# Altium PCB Copy of BSc_PCB_teikningcopy1.PcbDoc
Units mil, origin at the board's own origin, x right, y up, seen from the top; angles counter-clockwise.
Board outline 3150.59 x 3350.1 mil, 2 copper layers (Top Layer, Bottom Layer); 45 components, 39 nets, 192 pads, 19 vias.
Unrouted connection lines stored in the file: 58.
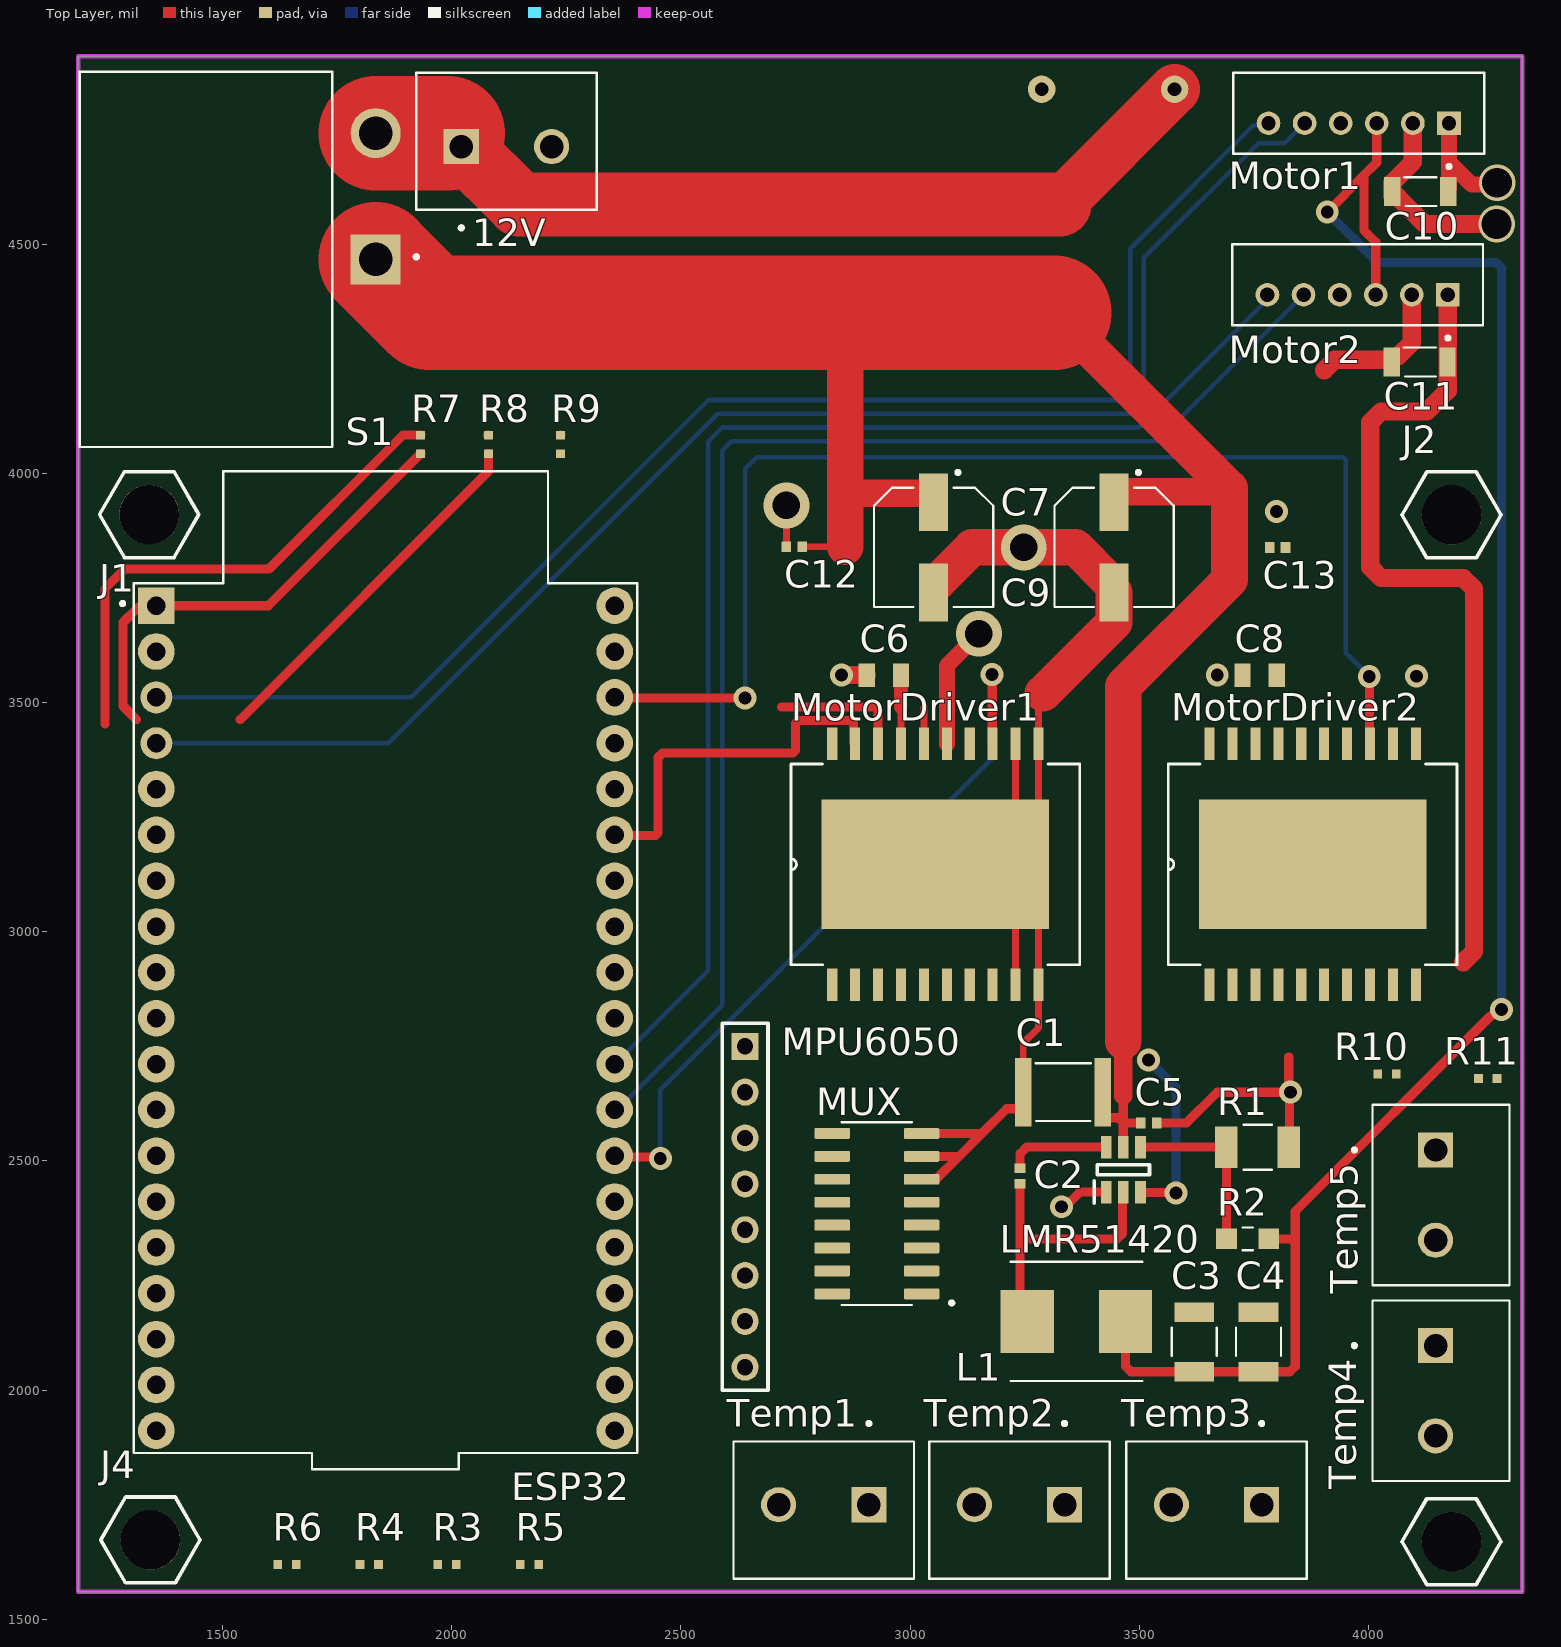
[diagram p0: Top Layer view]
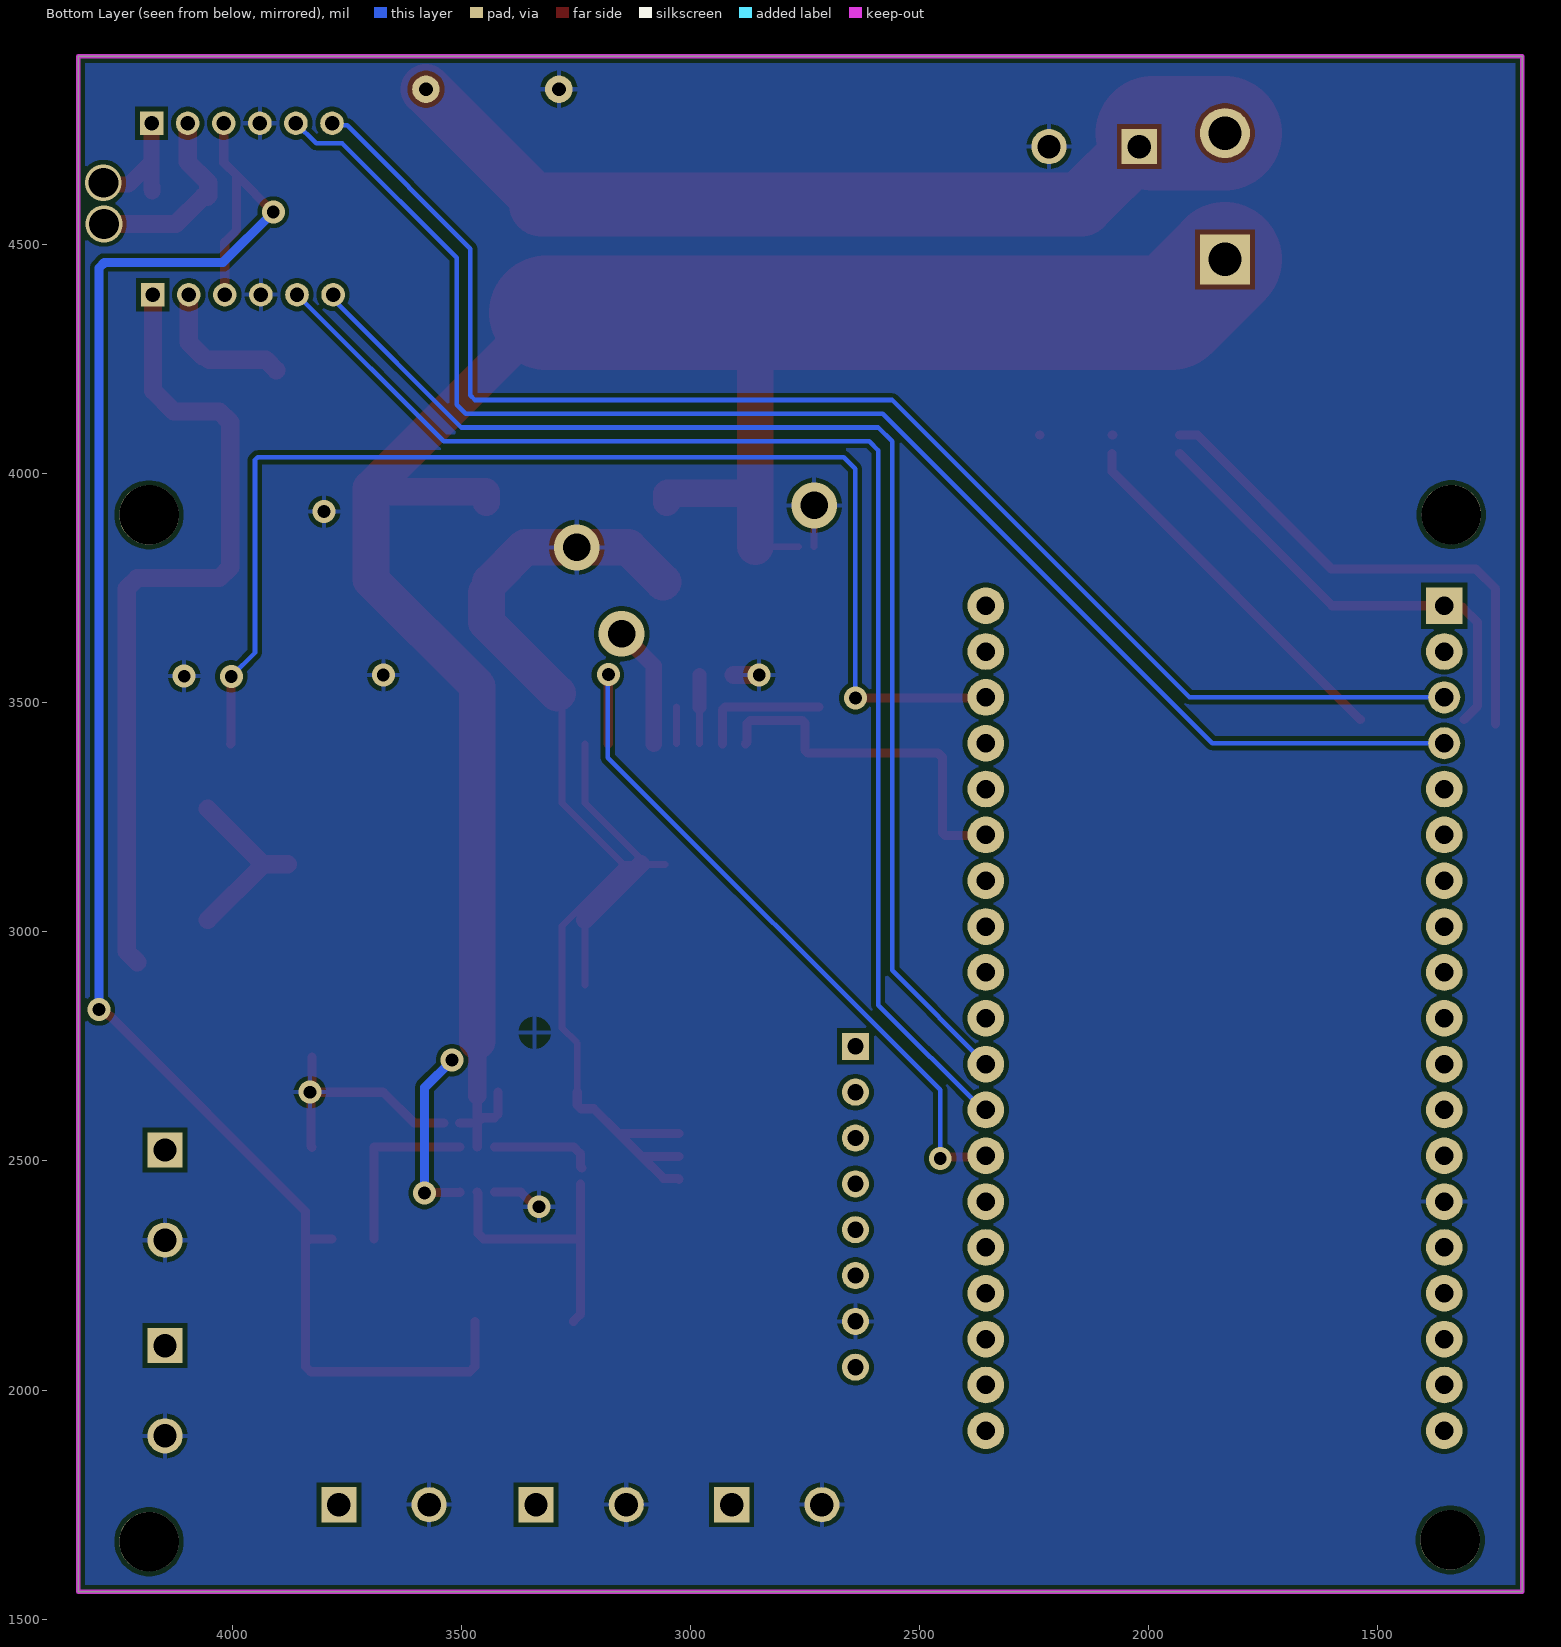
[diagram p1: Bottom Layer view, seen from below]

## Layer stack, top to bottom
Top Solder: solder mask 0.4, Solder Resist, Dk 3.5
Top Layer: signal copper 1.4
Dielectric 1: dielectric 12.6, FR-4, Dk 4.8
Bottom Layer: signal copper 1.4
Bottom Solder: solder mask 0.4, Solder Resist, Dk 3.5

## Board outline
1185.04,1560 1185.04,4910 3570,4910 3569.16,4910.1 4335.63,4910.1 4335.63,1560.04 4335.59,1560

## Design rules (kind name [scope] priority, off if disabled: settings)
Clearance [All] p1: gap=10 ignorepadtopadclearanceinfootprint=FALSE except(0: Arc-Hole Track-Hole SMDPad-Hole THPad-Hole Via-Hole Fill-Hole Poly-Hole Region-Hole Text-Hole)
PolygonConnect [All] p1: connectstyle=Relief reliefconductorwidth=10 reliefentries=4 polygonreliefangle="90 Angle" airgapwidth=10
RoutingVias [All] p1: holewidth=28 width=50 viastyle="Through Hole" minholewidth=28 minwidth=50 maxholewidth=80 maxwidth=100
SolderMaskExpansion [All] p1: expansion=4 istentingtop=FALSE
Width [All] p1: maxlimit=500 minlimit=10 preferedwidth=10 minimp=50.000000 maximp=50.000000 favimp=50.000000
30 further rules are at their usual default settings.

## Classes and differential pairs
component class BSc_skjemateikning: 12V C1 C2 C3 C4 C5 C6 C7 C8 C9 C10 C11 C12 C13 ESP32 J1 J2 J4 L1 LMR51420 Motor1 Motor2 MotorDriver1 MotorDriver2 MPU6050 R1 R2 R3 R4 R5 R6 R7 R8 R9 R10 R11 S1 Temp1 Temp2 Temp3 Temp4 Temp5

## Components (designator, comment, footprint, x,y, rotation, side; value= is the part's Value field where it differs from the comment)
12V "TB002-500-02BE" CUI_TB002-500-02BE 2020.87,4712.83 r0 top
C1 "885012210032" WCAP-CSGP_885012210032 3333.39,2650 r0 top
C2 "CGA2B3X7R1E104K050BB" CAPC1005X55N 3240,2467.2 r270 top
C3 "CGA6P3X7R1E226M250AE" CAP_CGA6P3X7R1E226M250AE 3620,2105.04 r270 top
C4 "CGA6P3X7R1E226M250AE" CAP_CGA6P3X7R1E226M250AE 3760,2105.04 r270 top
C5 "CGA2B3X7R1E104K050BB" CAPC1005X55N 3520.52,2582.93 r0 top
C6 "885012207125" WCAP-CSGP_885012207125 2942.6,3560 r0 top
C7 "EEETQV470XAP" CAP_EEETQV470XAP 3051.18,3838.58 r270 top
C8 "885012207125" WCAP-CSGP_885012207125 3762.6,3560 r0 top
C9 "EEETQV470XAP" CAP_EEETQV470XAP 3444.88,3838.58 r270 top
C10 "885012208069" WCAP-CSGP_885012208069 4113.02,4614.65 r0 top
C11 "885012208069" WCAP-CSGP_885012208069 4111.59,4242.88 r0 top
C12 "CGA2B3X7R1E104K050BB" CAPC1005X55N 2747.2,3840 r180 top
C13 "CGA2B3X7R1E104K050BB" CAPC1005X55N 3801.69,3838.58 r0 top
ESP32 "ESP32-DEVKITC" MODULE_ESP32-DEVKITC 1855.51,2811.65 r0 top
J1 "15TSP105" SAMTEC_SO-0715-02-01-01-L 1340,3910 r0 top
J2 "15TSP105" SAMTEC_SO-0715-02-01-01-L 4181.1,3909.45 r0 top
J3 "15TSP105" SAMTEC_SO-0715-02-01-01-L 4181.1,1669.29 r180 top
J4 "15TSP105" SAMTEC_SO-0715-02-01-01-L 1342.52,1673.23 r0 top
L1 "AMPLA7050S-100MT" IND_AMPLA7050S-100MT 3362.72,2150 r0 top
LMR51420 "LMR51420XDDCR" SOT95P280X110-6N 3465.07,2481.08 r90 top
Motor1 "" JST_B6B-PH-K-S(LF)(SN) 3978.71,4785.56 r0 top
Motor2 "" JST_B6B-PH-K-S(LF)(SN) 3976.38,4411.42 r0 top
MotorDriver1 "MC33886PVW" SOIC127P1420X340-21N 3055,3147 r90 top
MotorDriver2 "MC33886PVW" SOIC127P1420X340-21N 3878.25,3147 r90 top
MPU6050 "" HDR1X8 2640,2750 r270 top
MUX "SN74LV4051ADR" SOIC127P600X175-16N 2927.44,2385 r180 top (schematic designator Multiplexer)
R1 "ERJ14NF1372U" RES_ERJ14NF1372U 3757.91,2530 r180 top
R2 "ERJP06D1003V" RES_ERJP06D1003V 3736.26,2330 r180 top
R3 "ERJ2RKF1002X" RES_ERJ2RKF1002X 1989.84,1620 r0 top
R4 "ERJ2RKF1002X" RES_ERJ2RKF1002X 1820,1620 r180 top
R5 "ERJ2RKF1002X" RES_ERJ2RKF1002X 2170,1620 r0 top
R6 "ERJ2RKF1002X" RES_ERJ2RKF1002X 1640.16,1620 r0 top
R7 "ERJ2RKF1002X" RES_ERJ2RKF1002X 1932.28,4063.23 r270 top
R8 "ERJ2RKF1002X" RES_ERJ2RKF1002X 2079.92,4063.23 r90 top
R9 "ERJ2RKF1002X" RES_ERJ2RKF1002X 2237.4,4063.23 r90 top
R10 "ERJ2RKF1002X" RES_ERJ2RKF1002X 4040,2690 r180 top
R11 "ERJ2RKF1002X" RES_ERJ2RKF1002X 4260.16,2680 r0 top
S1 "R1966ABLKBLKGR" SW_R1966ABLKBLKGR 1833.86,4466.77 r270 top
Temp1 "TB002-500-02BE" CUI_TB002-500-02BE 2910,1750 r180 top
Temp2 "TB002-500-02BE" CUI_TB002-500-02BE 3336.85,1750 r180 top
Temp3 "TB002-500-02BE" CUI_TB002-500-02BE 3766.85,1750 r180 top
Temp4 "TB002-500-02BE" CUI_TB002-500-02BE 4146.29,2097.02 r270 top
Temp5 "TB002-500-02BE" CUI_TB002-500-02BE 4146.29,2523.84 r270 top
? "USB Li-ion batterilader" "USB Li-ion batterilader" 3576.98,4838.01 r180 top

## Footprints (in the part's own frame and the unit in brackets; to place one, negate y for a bottom-side part, rotate by r counter-clockwise, add the part's x,y. Pads: shape width x height; smd on the part's side, far side on the other; paste and mask are expansions set on the pad)
CAP_CGA6P3X7R1E226M250AE [mm]
  rect 1.1x2.2 smd: 1(-1.65,0) 2(1.65,0)
  silkscreen extent -0.78,-1.25 0.78,1.25, body extent -1.6,-1.25 1.6,1.25, height 2.8
CAP_EEETQV470XAP [mm]
  rect 3.2x1.6 smd: 1(-2.5,0) 2(2.5,0)
  silkscreen extent -4.25,-3.3 3.3,3.3, body extent -3.65,-3.3 3.65,3.3, height 7.7
CAPC1005X55N [mm]
  rect 0.53x0.6 smd: 1(-0.437,0) 2(0.437,0)
  body extent -0.5,-0.25 0.5,0.25, height 0.55
CUI_TB002-500-02BE [mm]
  rect 1.95x1.95 hole 1.3: 1(0,0)
  round 1.95 hole 1.3: 2(5,0)
  silkscreen extent -2.5,-4.6 7.5,4.1
HDR1X8 [mm] "Connector; Header; 8 Position"
  rect 1.5x1.5 hole 0.9: 1(0,0)
  round 1.5 hole 0.9: 2(2.54,0) 3(5.08,0) 4(7.62,0) 5(10.16,0) 6(12.7,0) 7(15.24,0) 8(17.78,0)
  silkscreen extent -1.27,-1.27 19.05,1.27
IND_AMPLA7050S-100MT [mm]
  rect 2.95x3.5 smd: 1(-2.725,0) 2(2.725,0)
  silkscreen extent -3.65,-3.3 3.65,3.3, body extent -3.72,-3.3 3.72,3.3, height 4.8
JST_B6B-PH-K-S(LF)(SN) [mm]
  rect 1.308x1.308 hole 0.8: 1(5,-0.55)
  round 1.308 hole 0.8: 2(3,-0.55) 3(1,-0.55) 4(-1,-0.55) 5(-3,-0.55) 6(-5,-0.55)
  silkscreen extent -6.95,-3.05 6.95,2.25
MODULE_ESP32-DEVKITC [mil]
  rect 80x80 hole 40.16: 1(-500,899.61)
  round 80 hole 40.16: 2(-500,799.61) 5(-500,499.61) 6(-500,399.61) 7(-500,299.61) 8(-500,199.61) 9(-500,99.61) 10(-500,-0.39) 11(-500,-100.39) 12(-500,-200.39) 13(-500,-300.39) 14(-500,-400.39) 15(-500,-500.39) 16(-500,-600.39) 17(-500,-700.39) 18(-500,-800.39) 19(-500,-900.39) 20(500,-900.39) 21(500,-800.39) 22(500,-700.39) 23(500,-600.39) 24(500,-500.39) 25(500,-400.39) 26(500,-300.39) 27(500,-200.39) 28(500,-100.39) 29(500,-0.39) 30(500,99.61) 31(500,199.61) 32(500,299.61) 33(500,399.61) 34(500,499.61) 35(500,599.61) 36(500,699.61) 37(500,799.61) 38(500,899.61)
  round 70 hole 40.16: 3(-500,699.61) 4(-500,599.61)
  silkscreen extent -578,-984 549,1193, body extent -550,-976 550,1193, height 228
RES_ERJ2RKF1002X [mm]
  rect 0.475x0.5 smd: 1(-0.512,0) 2(0.512,0)
  body extent -0.5,-0.25 0.5,0.25, height 0.35
RES_ERJ14NF1372U [mm]
  rect 1.25x2.3 smd: 1(-1.725,0) 2(1.725,0)
  silkscreen extent -0.78,-1.25 0.78,1.25, body extent -1.6,-1.25 1.6,1.25, height 0.6
RES_ERJP06D1003V [mm]
  rect 1.15x1.15 smd: 1(-1.175,0) 2(1.175,0)
  silkscreen extent -0.28,-0.63 0.28,0.63, body extent -1,-0.63 1,0.63, height 0.6
SAMTEC_SO-0715-02-01-01-L [mm]
  round 3.3 hole 3.3 unplated: ""(0,0)
  silkscreen extent -2.75,-2.38 2.75,2.38
SOIC127P600X175-16N [mm]
  rrect25% 1.97x0.6 smd: 1(-2.475,4.445) 2(-2.475,3.175) 3(-2.475,1.905) 4(-2.475,0.635) 5(-2.475,-0.635) 6(-2.475,-1.905) 7(-2.475,-3.175) 8(-2.475,-4.445) 9(2.475,-4.445) 10(2.475,-3.175) 11(2.475,-1.905) 12(2.475,-0.635) 13(2.475,0.635) 14(2.475,1.905) 15(2.475,3.175) 16(2.475,4.445)
  silkscreen extent -4.25,-5.06 1.95,5.06, body extent -3,-4.95 3,4.95, height 1.75
SOIC127P1420X340-21N [mil]
  rect 71x22 smd: 1(-263,225) 2(-263,175) 3(-263,125) 4(-263,75) 5(-263,25) 6(-263,-25) 7(-263,-75) 8(-263,-125) 9(-263,-175) 10(-263,-225) 11(263,-225) 12(263,-175) 13(263,-125) 14(263,-75) 15(263,-25) 16(263,25) 17(263,75) 18(263,125) 19(263,175) 20(263,225)
  rect 283x496 smd: 21(0,0)
  silkscreen extent -219,-315 219,315, body extent -280,-313 280,313, height 134
SOT95P280X110-6N [mm]
  rect 1.25x0.6 smd: 1(-1.25,0.95) 2(-1.25,0) 3(-1.25,-0.95) 4(1.25,-0.95) 5(1.25,0) 6(1.25,0.95)
  silkscreen extent -1.88,-1.45 0.28,1.6, body extent -1.4,-1.45 1.4,1.45, height 0.97
SW_R1966ABLKBLKGR [mm]
  rect 2.775x2.775 hole 1.85: 1(0,0)
  round 2.775 hole 1.85: 1A(-7,0)
  silkscreen extent -10.4,-16.4 10.4,2.35, body extent -10.47,-22.2 10.47,0.6, height 14.8
"USB Li-ion batterilader" [mil]
  round 60 hole 30: 1(0,0) 2(290,0)
  body extent -100,-40 1235,810, height 197
WCAP-CSGP_885012207125 [mm]
  rect 0.9x1.3 smd: 1(-0.95,0) 2(0.95,0)
  body extent -1,-0.63 1,0.63, height 0.63
WCAP-CSGP_885012208069 [mm]
  rect 0.9x1.6 smd: 1(-1.55,0) 2(1.55,0)
  silkscreen extent -0.9,-0.8 0.9,0.8, body extent -1.6,-0.8 1.6,0.8, height 1.25
WCAP-CSGP_885012210032 [mm]
  rect 0.9x3.8 smd: 1(-2.2,0) 2(2.2,0)
  silkscreen extent -1.52,-1.6 1.56,1.6, body extent -1.6,-1.25 1.6,1.25, height 0.38

## Part data
12V C3 C4 C7 C9 ESP32 L1 MUX R1 R2 R3 R4 R5 R6 R7 R8 R9 R10 R11 S1 Temp1 Temp2 Temp3 Temp4 Temp5: Package=None, Availability=Unavailable, Price=None
  12V Temp1 Temp2 Temp3 Temp4 Temp5: MF="{'manufacturer': u'CUI Devices'}", MP=TB002-500-02BE
  C3 C4: MF="{'manufacturer': u'TDK Corporation'}", MP=CGA6P3X7R1E226M250AE
  C7 C9: MF="{'manufacturer': u'Panasonic'}", MP=EEETQV470XAP
  ESP32: MF="{'manufacturer': u'Olimex LTD'}", MP=ESP32-DEVKITC
  L1: MF="{'manufacturer': u'Abracon Corporation'}", MP=AMPLA7050S-100MT
  MUX: MF="{'manufacturer': u'Texas Instruments'}", MP=SN74LV4051ADR
  R1: MF="{'manufacturer': u'Panasonic'}", MP=ERJ14NF1372U
  R2: MF="{'manufacturer': u'Panasonic'}", MP=ERJP06D1003V
  R3 R4 R5 R6 R7 R8 R9 R10 R11: MF="{'manufacturer': u'Panasonic'}", MP=ERJ2RKF1002X
  S1: MF="{'manufacturer': u'E-Switch'}", MP=R1966ABLKBLKGR
C1: "<b> WCAP-CSGP Ceramic Capacitors <br> <br> <br><b>Characteristics </b><br> </b><br>Multilayer Ceramic Chip Capacitor <br>Recommended soldering:Reflow, for 0603 and 0805 wave soldering is also allowed <br>Operating temperature:-55 Â°C to +125 Â°C; <br>Ceramic characteristics: Class I - NPO ; Class II -X7R, X5R <br>High performance ceramic <br>High capacitance stability <br>Minimal aging  <br>Termination:Cu/Ni/Sn <br>   <br><a href=\"http://katalog.we-online.de/media/images/eisos/WCAP-CSGP_pf2.jpg\" title=\"Enlarge picture\"> <img src=\"http://katalog.we-online.de/media/thumbs2/eisos/thb_WCAP-CSGP_pf2.jpg\" width=\"320\"></a><p> Details see: <a href=\"http://katalog.we-online.de/en/pbs/WCAP-CSGP-1812?\">http://katalog.we-online.de/en/pbs/WCAP-CSGP-1812? </a><p>Created:  2015-01-28 <br>2015 (C) Wurth Elektronik", Package=None, Availability=Unavailable, MF="{'manufacturer': u'Wurth Electronics Inc'}", MP=885012210032, Price=None
C2 C5 C12 C13: "0.1 ÂµF Â±10% 25V Ceramic Capacitor X7R 0402 (1005 Metric)", Package=None, Availability=Unavailable, MF="{'manufacturer': u'TDK Electronics'}", MP=CGA2B3X7R1E104K050BB, Price=None
C6 C8: "<b> WCAP-CSGP Ceramic Capacitors <br> <br> <br><b>Characteristics </b><br> </b><br>Multilayer Ceramic Chip Capacitor <br>Recommended soldering:Reflow, for 0603 and 0805 wave soldering is also allowed <br>Operating temperature:-55 Â°C to +125 Â°C; <br>Ceramic characteristics: Class I - NPO ; Class II -X7R, X5R <br>High performance ceramic <br>High capacitance stability <br>Minimal aging  <br>Termination:Cu/Ni/Sn <br>   <br><a href=\"http://katalog.we-online.de/media/images/eisos/WCAP-CSGP_pf2.jpg\" title=\"Enlarge picture\"> <img src=\"http://katalog.we-online.de/media/thumbs2/eisos/thb_WCAP-CSGP_pf2.jpg\" width=\"320\"></a><p> Details see: <a href=\"http://katalog.we-online.de/en/pbs/WCAP-CSGP-0805?\">http://katalog.we-online.de/en/pbs/WCAP-CSGP-0805? </a><p>Created:  2015-01-28 <br>2015 (C) Wurth Elektronik", Package=None, Availability=Unavailable, MF="{'manufacturer': u'Wurth Electronics Inc'}", MP=885012207125, Price=None
C10 C11: "<b> WCAP-CSGP Ceramic Capacitors <br> <br> <br><b>Characteristics </b><br> </b><br>Multilayer Ceramic Chip Capacitor <br>Recommended soldering:Reflow, for 0603 and 0805 wave soldering is also allowed <br>Operating temperature:-55 Â°C to +125 Â°C; <br>Ceramic characteristics: Class I - NPO ; Class II -X7R, X5R <br>High performance ceramic <br>High capacitance stability <br>Minimal aging  <br>Termination:Cu/Ni/Sn <br>   <br><a href=\"http://katalog.we-online.de/media/images/eisos/WCAP-CSGP_pf2.jpg\" title=\"Enlarge picture\"> <img src=\"http://katalog.we-online.de/media/thumbs2/eisos/thb_WCAP-CSGP_pf2.jpg\" width=\"320\"></a><p> Details see: <a href=\"http://katalog.we-online.de/en/pbs/WCAP-CSGP-1206?\">http://katalog.we-online.de/en/pbs/WCAP-CSGP-1206? </a><p>Created:  2015-01-28 <br>2015 (C) Wurth Elektronik", Package=None, Availability=Unavailable, MF="{'manufacturer': u'Wurth Electronics Inc'}", MP=885012208069, Price=None
J1 J2 J3 J4: library part SO-0715-02-01-01-L, Package=None, Availability=Unavailable, MF="{'manufacturer': u'Samtec'}", MP=SO-0715-02-01-01-L, Price=None
LMR51420: "Integrated Circuit", Manufacturer_Name="Texas Instruments", Mouser Part Number=595-LMR51420XDDCR, Arrow Part Number=LMR51420XDDCR, Arrow Price/Stock=https://www.arrow.com/en/products/lmr51420xddcr/texas-instruments?region=nac, Datasheet Link=https://www.ti.com/lit/ds/symlink/lmr51420.pdf?ts=1663231243064, Height=1.1mm, Manufacturer_Part_Number=LMR51420XDDCR, Mouser Price/Stock=https://www.mouser.co.uk/ProductDetail/Texas-Instruments/LMR51420XDDCR?qs=vvQtp7zwQdN6fBqQU4azxw%3D%3D
Motor1 Motor2: library part B6B-PH-K-S(LF)(SN), Package=None, Availability=Unavailable, MF="{'manufacturer': u'JST'}", MP=B6B-PH-K-S(LF)(SN), Price=None
MotorDriver1 MotorDriver2: "H-Bridge", Package=None, Availability=Unavailable, MF="{'manufacturer': u'NXP USA'}", MP=MC33886PVW, Price=None
MPU6050: library part "Header 8", "Header, 8-Pin", LatestRevisionDate=17-Jul-2002, LatestRevisionNote="Re-released for DXP Platform.", Publisher="Altium Limited"

## Via types
v1: diameter 50, hole 28, Top Layer to Bottom Layer, 13 vias
v2: diameter 100, hole 60, Top Layer to Bottom Layer, 3 vias
v3: diameter 80, hole 65, Top Layer to Bottom Layer, 2 vias
v4: diameter 50/50 (per signal layer), hole 28, Top Layer to Bottom Layer, 1 vias

## Nets (pads, with @x,y where several pads share a name; then routed paths per layer and width w, separated by ;. In a path a pad name is that pad's centre, name@x,y a point inside that pad or via, vN(x,y) a via of type N, cw(c..) or ccw(c..) an arc to the next point about the centre after c; other vN are vias at no path point)
D1: ESP32.37 MotorDriver2.18
D2: ESP32.36 MotorDriver2.13 | length 2749.6
  Top Layer w20: ESP32.36 2356.77,3510 v1(2640,3510) ; v1(4001.61,3557.02) 4002.43,3556.19 4002.43,3410.82 MotorDriver2.13
  Bottom Layer w10: v1(2640,3510) 2640,4010 2665.43,4035.43 3944.14,4035.43 3950,4029.58 3950,3608.63 v1(4001.61,3557.02)
D3: ESP32.15 MotorDriver1.18 | length 286.6
  Top Layer w20: 2720,3490 2924.14,3490 2930,3484.14 MotorDriver1.18
D4: ESP32.26 MotorDriver1.13 | length 1609.8
  Top Layer w20: ESP32.26 2358.45,2508.33 2452.07,2508.33 v1(2455,2505.39) ; v1(3178.55,3560.87) 3179.28,3560.14 3179.28,3410.72 MotorDriver1.13
  Bottom Layer w10: v1(2455,2505.39) 2455,2655 3180,3380 3180,3559.42 v1(3178.55,3560.87)
FS1: ESP32.5 MotorDriver2.2 R6.1
FS2: ESP32.6 MotorDriver1.2 R5.2
GND: 12V.2 ?.2 C1.1 C3.1 C4.1 C5.2 C6.1 C7.2 C8.1 C9.2 C12.2 C13.2 ESP32.14 LMR51420.1 Motor1.4 Motor2.4 MotorDriver1.1 MotorDriver1.9 MotorDriver1.10 MotorDriver1.11 MotorDriver1.12 MotorDriver1.21 MotorDriver2.1 MotorDriver2.9 MotorDriver2.10 MotorDriver2.11 MotorDriver2.12 MotorDriver2.21 MPU6050.7 MUX.6 MUX.7 MUX.8 R1.1 Temp1.2 Temp2.2 Temp3.2 Temp4.2 Temp5.2 | length 4145.1
  Top Layer w15: C12.2 v2(2730,3930) ; MotorDriver1.21 MotorDriver1.21@3096,3147 ; MotorDriver1.21@3145.83,3147 3279.83,3013 MotorDriver1.10@3279.83,2884.17 ; MotorDriver1.9 MotorDriver1.21@3230,3025.5 ; MotorDriver1.12 3230,3281 MotorDriver1.21@3096,3147 ; C1.1 3246.77,2756.77 3280,2790 MotorDriver1.10 ; 3280,3520 MotorDriver1.11 3280,3281 3146,3147 3108.5,3147 MotorDriver1.21@3096,3147
  Top Layer w20: MUX.6 3026.69,2461.81 3058.58,2461.81 3106.77,2510 ; MUX.7 3106.77,2510 ; MUX.8 3156.77,2560 ; C1.1 3246.77,2621.72 3239.05,2614 3210.77,2614 3156.77,2560 ; v1(3330,2400) 3338.12,2400 3369.99,2431.87 LMR51420.1 ; C5.2 3602.93,2582.93 3670,2650 v1(3830,2650) 3827.91,2647.91 3827.91,2532.09 R1.1 ; v1@3825.83,2650 3825.83,2727.02 ; 3106.77,2510 3156.77,2560
  Top Layer w40: v1(2850,3560) C6.1 ; MotorDriver1.21@3108.5,3147 MotorDriver1.21@3230,3025.5 ; MotorDriver2.21 MotorDriver2.21@3931.75,3147 ; MotorDriver2.21@4053.25,3025.5 MotorDriver2.21@3931.75,3147 ; MotorDriver2.21@4053.25,3268.5 MotorDriver2.21@3931.75,3147 ; v1@4103.82,3556.92 v1(4104.38,3557.48)
  Top Layer w80: C7.2@3059.68,3763.15 3135.12,3838.58 v2(3248.03,3838.58) 3248.54,3839.09 3360.44,3839.09 C9.2@3436.38,3763.15 ; 3290,3520 3444.88,3674.88 C9.2
  other v1: 3670,3560
  other v4: 3799.21,3916.69
IN1: ESP32.9 MotorDriver2.3
IN2: ESP32.10 MotorDriver2.19
IN3: ESP32.11 MotorDriver1.3
IN4: ESP32.33 MotorDriver1.19 | length 804
  Top Layer w20: ESP32.33 2356.77,3210 2444.14,3210 2450,3215.86 2450,3380 2460,3390 2744.14,3390 2750,3395.86 2750,3454.64 2755.86,3460.5 2870.07,3460.5 2876.43,3454.14 2876.43,3413.57 MotorDriver1.19
"Motor1Channel A": ESP32.4 Motor1.5 | length 3252.8
  Bottom Layer w10: ESP32.4 1861.26,3411.26 2580,4130 3490,4130 3510,4150 3510,4470 3760,4720 3816.7,4720 Motor1.5
"Motor1Channel B": ESP32.3 Motor1.6 | length 3132.7
  Bottom Layer w10: ESP32.3 1911.26,3511.26 2560,4160 3470,4160 3480,4170 3480,4490 3749.07,4759.07 3777.03,4759.07 Motor1.6
Motor2ChannelA: ESP32.27 Motor2.5 | length 2948.2
  Bottom Layer w10: ESP32.27 2361.26,2611.26 2590,2840 2590,4050 2610,4070 3538.5,4070 Motor2.5
Motor2ChannelB: ESP32.28 Motor2.6 | length 2801.4
  Bottom Layer w10: ESP32.28 2560,2915.75 2560,4070 2590,4100 3500,4100 3779.53,4379.53 Motor2.6
MuxCOM: ESP32.12 MUX.3
MuxInputA: ESP32.31 MUX.11
MuxInputB: ESP32.30 MUX.10
MuxInputC: ESP32.13 MUX.9
Net12V_1: 12V.1 ?.1 S1.1A | length 1870
  Top Layer w110: 3325.58,4586.61 ?.1
  Top Layer w140: 12V.1 2147.09,4586.61 3325.58,4586.61
  Top Layer w250: S1.1A 12V.1@1991.34,4742.36
NetC1_2: C1.2 C5.1 C7.1 C9.1 C12.1 C13.1 LMR51420.3 LMR51420.5 MotorDriver1.16 MotorDriver2.16 S1.1 | length 5313
  Top Layer w15: C12.1 2858.27,3840 ; MotorDriver1.16 3030,3490
  Top Layer w20: C1.2 3420,2601.99 3427.72,2594.27 3453.36,2594.27 3464.7,2582.93 ; LMR51420.5 3465.07,2582.55 3464.7,2582.93 ; 3465.12,2582.93 3465.12,2642.5 ; LMR51420.3 3503.41,2430.93 3579.07,2430.93 v1(3580,2430) ; C5.1 3464.7,2582.93 ; v1@3514.26,2714.26 v1(3520,2720)
  Top Layer w40: 3465,2760.78 3465,2642.62 3465.12,2642.5
  Top Layer w60: 2858.27,3956.69 3049.68,3956.69 3051.18,3955.2 C7.1 ; C9.1 3444.88,3958.28 3446.38,3959.78 3696.82,3959.78
  Top Layer w80: 2858.27,3840 2858.27,3956.69 2858.27,4350 ; 3314.01,4350 3696.82,3967.19 3696.82,3767.74 3464.96,3535.88 3464.96,3162.11 3465,3162.07 3465,2760.78
  Top Layer w250: S1.1 1950.63,4350 2858.27,4350 3314.01,4350
  Bottom Layer w20: v1(3520,2720) 3580,2660 v1(3580,2430)
NetC2_1: C2.1 LMR51420.6 | length 226.2
  Top Layer w20: C2.1@3237.2,2484.41 3240,2487.2 3240,2515.78 3254.51,2530.29 LMR51420.6
NetC2_2: C2.2 L1.1 LMR51420.2 | length 625.4
  Top Layer w20: C2.2 3240,2330 ; L1.1 3240,2165.43 3240,2330 ; LMR51420.2 3463.26,2430.06 3463.26,2341.72 3451.55,2330 3240,2330
NetC3_2: C3.2 C4.2 ESP32.19 L1.2 Motor1.3 Motor2.3 MUX.16 R2.1 R5.1 R6.2 | length 4068.4
  Top Layer w20: L1.2 3470,2051.72 3481.72,2040 3619.92,2040 C3.2 C4.2 3828.28,2040.08 3840,2051.79 3840,2320 ; R2.1 3830,2330 3840,2320 ; v1(3910,4570) 3990,4650 ; Motor2.3 4015.75,4504.55 3990,4530.3 3990,4650 ; Motor1.3 4018.08,4678.08 3990,4650 ; v1(4290,2830) 4281.88,2830 4267.99,2816.11 4266.11,2816.11 3840,2390 3840,2330 3840,2320
  Bottom Layer w20: v1(3910,4570) 4020,4460 4278.28,4460 4290,4448.28 v1(4290,2830)
NetC6_2: C6.2 MotorDriver1.17 | length 150
  Top Layer w15: MotorDriver1.17 2980,3490
  Top Layer w30: 2980,3490 C6.2
NetC8_2: C8.2 MotorDriver2.17
NetC10_1: C10.1 Motor1.2 MotorDriver1.15 | length 699
  Top Layer w35: MotorDriver1.15 3080,3580 v2(3150,3650)
  Top Layer w40: Motor1.2 4096.82,4679.5 4052,4634.67 4052,4605.43 4054.28,4603.15 4063.49,4603.15 4122.78,4543.87 v3(4279.48,4543.87)
NetC10_2: C10.2 Motor1.1 MotorDriver1.7 | length 283.2
  Top Layer w35: C10.2 4174.04,4625.03 C10.2@4174.26,4625.25 ; C10.2@4175.56,4618.77 4175.56,4680 ; Motor1.1 4175.56,4680 ; v3(4280.63,4633.86) 4276.77,4630 4225.56,4630 4175.56,4680
NetC11_1: C11.1 Motor2.2 MotorDriver2.15 | length 304.2
  Top Layer w40: 3903.25,4224.3 3902.95,4224.6 3926.38,4248.03 C11.1@4050.24,4248.03 ; C11.1@4064.45,4255.43 4094.49,4285.47 Motor2.2
NetC11_2: C11.2 Motor2.1 MotorDriver2.7 | length 1792.2
  Top Layer w40: Motor2.1@4172.61,4389.15 C11.2 4172.61,4180.49 4127.1,4134.97 4027.37,4134.97 4003.94,4111.54 4003.94,3795.09 4027.37,3771.65 4206.57,3771.65 4230,3748.22 4230,2956.97 4206.57,2933.53
NetESP32_1: ESP32.1 MPU6050.8 R3.2 R4.2 R7.2 R8.1 R9.1 R10.1 R11.1 | length 1830.7
  Top Layer w20: 1312.2,3462.83 1282.68,3492.36 1282.68,3674.66 1316.25,3708.24 1352.49,3708.24 ESP32.1 1599.98,3711.26 1931.79,4043.07 R7.2 ; 1538.58,3462.83 2079.92,4004.17 R8.1
NetESP32_7: ESP32.7 MPU6050.6 R3.1
NetESP32_8: ESP32.8 MPU6050.5 R4.1
NetLMR51420_4: LMR51420.4 R1.2 R2.2 | length 387.6
  Top Layer w20: LMR51420.4 3689.71,2530.29 R1.2 R2.2
Temp1: MUX.13 R7.1 Temp1.1 | length 1123.1
  Top Layer w20: 1243.31,3452.99 1243.31,3748.27 1286.38,3791.34 1601.34,3791.34 1893.39,4083.39 R7.1
Temp2: MUX.14 R8.2 Temp2.1 | length 1.2
  Top Layer w20: R8.2@2078.68,4083.39 R8.2
Temp3: MUX.15 R9.2 Temp3.1 | length 0.5
  Top Layer w20: R9.2 R9.2@2237.89,4083.39
Temp4: MUX.12 R10.2 Temp4.1
Temp5: MUX.1 R11.2 Temp5.1
pads on no net: ESP32.2 ESP32.16 ESP32.17 ESP32.18 ESP32.20 ESP32.21 ESP32.22 ESP32.23 ESP32.24 ESP32.25 ESP32.29 ESP32.32 ESP32.34 ESP32.35 ESP32.38 J1. J2. J3. J4. MotorDriver1.4 MotorDriver1.5 MotorDriver1.6 MotorDriver1.8 MotorDriver1.14 MotorDriver1.20 MotorDriver2.4 MotorDriver2.5 MotorDriver2.6 MotorDriver2.8 MotorDriver2.14 MotorDriver2.20 MPU6050.1 MPU6050.2 MPU6050.3 MPU6050.4 MUX.2 MUX.4 MUX.5

## Polygon pours and split planes (outlines as drawn)
GND on Bottom Layer "GND_L02_P000" (solid, pour order 0): 1185.04,1560 1185.04,4910 3570,4910 3569.16,4910.1 4335.63,4910.1 4335.63,1560.04 4335.59,1560

## Keep-outs
Keep-Out Layer:
  lines w10: 3569.16,4910.1 4335.63,4910.1 4335.63,4378.94 4335.63,3790.91 4335.63,1560.04 4335.59,1560 4294.33,1560 4024.57,1560 1530.55,1560 1185.04,1560 1185.04,4910 3260,4910 3570,4910